# EAGLE board Dimmer (EAGLE 9.1.0)
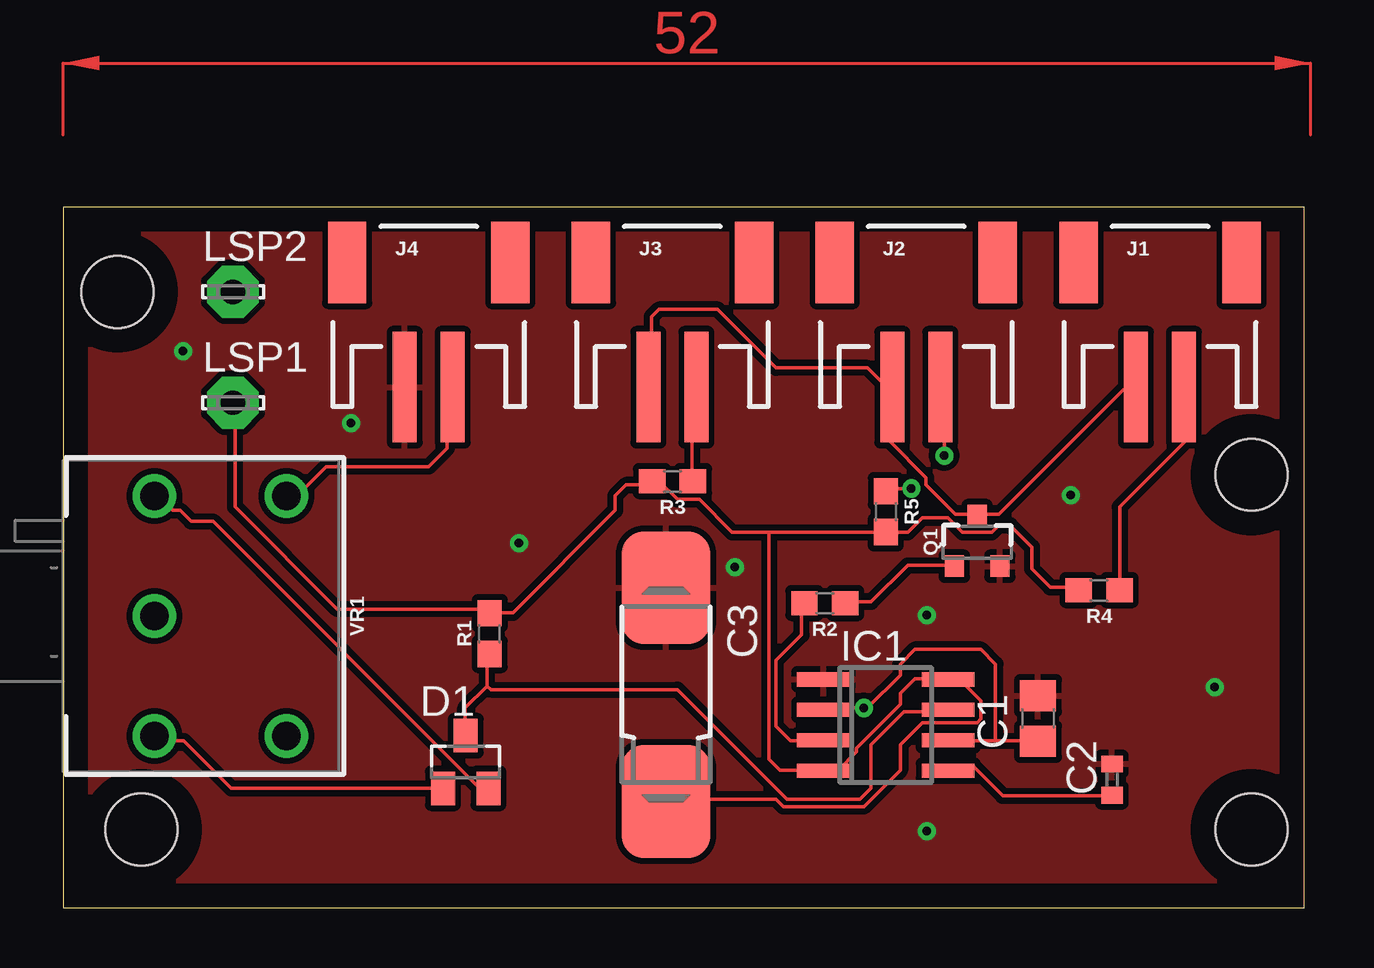
[diagram p0: board, top side]
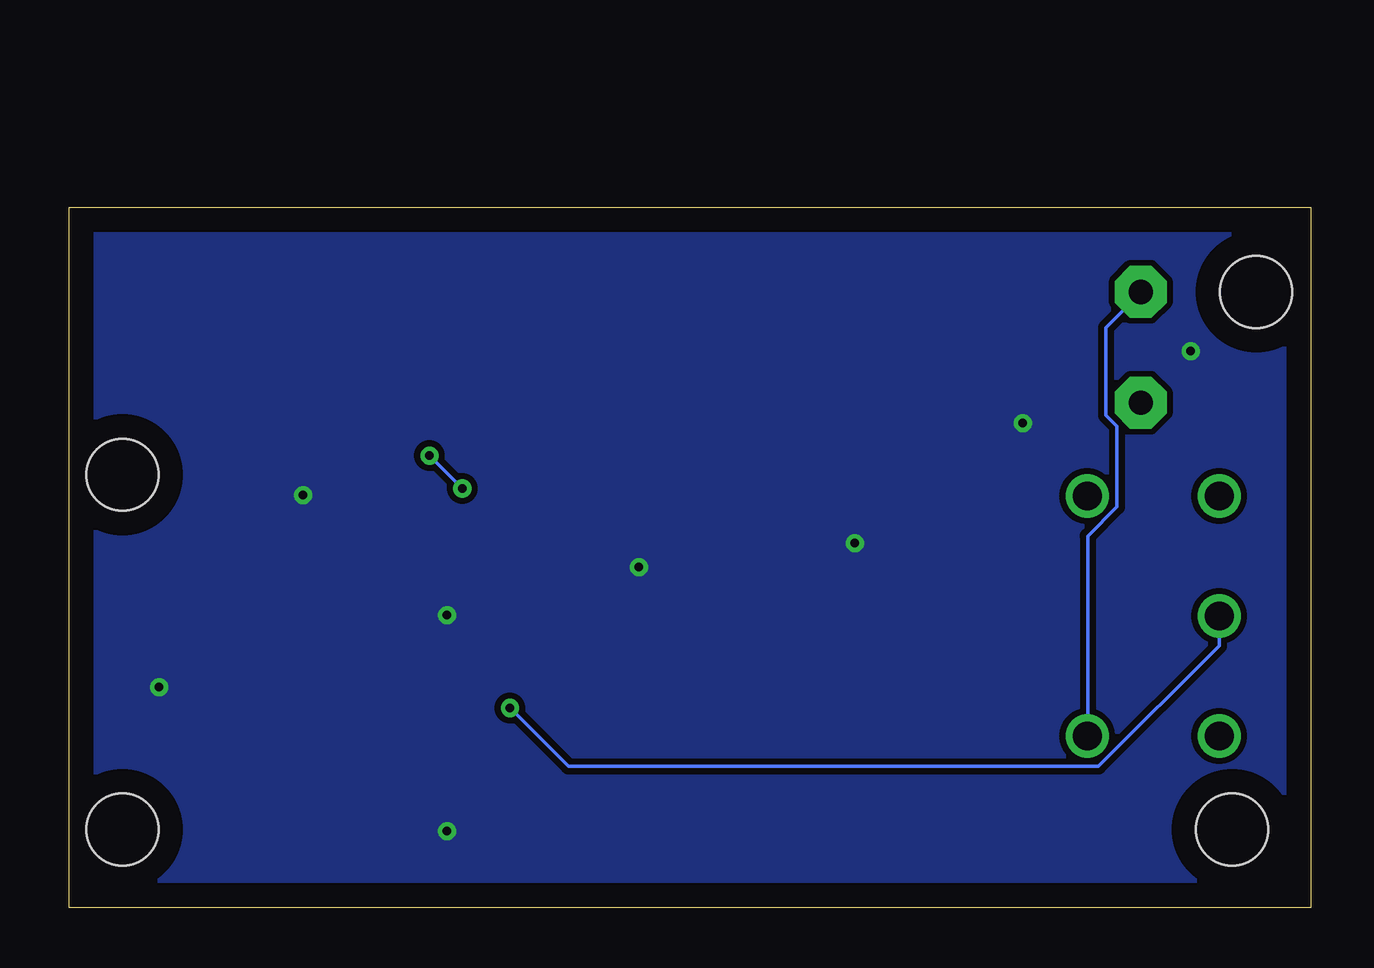
[diagram p1: board, bottom side, seen from below]

Size 51.74 x 29.2 mm. Coordinates in mm from the lower left corner, seen from the top.
Outline: 0,0 51.74,0 51.74,29.2 0,29.2 0,0
Copper layers (1*16): Top 0.035mm / dielectric 1.5mm / Bottom 0.035mm
Design rules "default": minimum track width 6mil, minimum drill 0.35mm, track to track 6mil, track to pad 6mil, pad to pad 6mil, via to via 6mil, smd to smd 6mil, copper to edge 40mil, drill to drill 6mil, minimum pad ring 10mil, minimum via ring 8mil, stop-mask expansion 4mil, vias tented up to drill 0mil, thermal gap 10mil
Holes 3 mm at 2.27,25.67 3.27,3.27 49.53,3.27 49.53,18.05

## Footprints (pad centres in the part's own frame; a part is rotated, then mirrored left to right if it is on the bottom)
C0805 = smd 1.3 x 1.5: 1 -0.95,0; 2 0.95,0
C0402 = smd 0.7 x 0.9: 1 -0.65,0; 2 0.65,0
085CS_1AW = smd 4.7 x 3.7: + 4.45,0; - -4.45,0
SOT23 = smd 1 x 1.4: 1 -0.95,-1.1; 2 0.95,-1.1; 3 0,1.1
SO08 = smd 0.6 x 2.2: 1 -1.905,-2.6; 2 -0.635,-2.6; 3 0.635,-2.6; 4 1.905,-2.6; 5 1.905,2.6; 6 0.635,2.6; 7 -0.635,2.6; 8 -1.905,2.6
JST-2-SMD = smd 1 x 4.6: 1 -1,-3.7; 2 1,-3.7 | smd 1.6 x 3.4: NC1 -3.4,1.5; NC2 3.4,1.5
LSP10 = drill 1.016 pad 2.159 octagon: MP 0,0
SOT23-3 = smd 0.8 x 0.9: 1 -0.95,-1; 2 0.95,-1; 3 0,1.1
0603 = smd 1.1 x 1: 1 -0.85,0; 2 0.85,0
POT-SWITCH-PTH = drill 1.2: 1 0,-5; 2 0,0; 3 0,5; S1 -5.5,5; S2 -5.5,-5

## Placement (x,y rotation side)
C1  0.1uF  [C0805]  40.64,7.89 90 top
C2  0.01uF  [C0402]  43.72,5.35 90 top
C3  470uF  [085CS_1AW]  25.13,8.89 270 top
D1  BAT54S  [SOT23]  16.78,6.08 0 top
IC1  LM555D  [SO08]  34.29,7.62 270 top
J1  [JST-2-SMD]  45.72,25.4 0 top
J2  [JST-2-SMD]  35.56,25.4 0 top
J3  [JST-2-SMD]  25.4,25.4 0 top
J4  [JST-2-SMD]  15.24,25.4 0 top
LSP1  LSP10  [LSP10]  7.08,21.05 0 top
LSP2  LSP10  [LSP10]  7.08,25.67 0 top
Q1  500mA/300V  [SOT23-3]  38.1,15.24 0 top
R1  1k  [0603]  17.78,11.43 90 top
R2  1k  [0603]  31.75,12.7 180 top
R3  1k  [0603]  25.4,17.78 180 top
R4  1k  [0603]  43.18,13.24 180 top
R5  1k  [0603]  34.29,16.51 270 top
VR1  1k  [POT-SWITCH-PTH]  3.81,12.16 180 top

## Library data of the parts
C1 C2 = eagle-ltspice; SPICEMODEL: NONE; SPICEPREFIX: C
C3 = resistor
D1 = diode
IC1 = linear
J1-J4 = SparkFun-Connectors; PROD_ID: CONN-11443; SF_ID: PRT-08612
LSP1 LSP2 = solpad
Q1 = SparkFun-DiscreteSemi; PROD_ID: TRANS-09116
R1-R5 = SparkFun-Resistors; PROD_ID: RES-07856
VR1 = SparkFun-Resistors; PROD_ID: RES-11300

## Nets
B$2: C3.+ IC1.4 IC1.8 LSP1.MP R1.2 R3.2 R4.2 R5.2
GND: C1.2 C2.2 C3.- IC1.1 J4.1 Q1.2
N$1: D1.1 VR1.3
N$2: D1.2 VR1.1
N$3: D1.3 IC1.7 R1.1
N$4: C2.1 IC1.5
N$5: C1.1 IC1.2 IC1.6 VR1.2
N$6: Q1.1 R2.1
N$7: IC1.3 R2.2
N$8: J1.1 J2.1 J3.1 Q1.3
N$9: J3.2 R3.1
N$10: LSP2.MP VR1.S1
N$11: J1.2 R4.1
N$12: J2.2 R5.1
N$13: J4.2 VR1.S2

## Tracks (layer width: path | path; a pad name or v marks a point on that pad's centre or on a via)
B$2
  Top 0.152: C3.+ 25.15,4.52 29.72,4.52 30.02,4.22 33.38,4.22 34.9,5.74 34.9,6.81 35.81,7.72 38.1,7.72 38.25,7.87 38.25,8.64 37.49,9.4 37.03,9.4 IC1.8 36.88,9.55 35.51,9.55 34.9,8.94 34.9,8.48 33.07,6.66 33.07,6.5 32.31,5.74 31.7,5.74 IC1.4 31.55,5.74 29.87,5.74 29.41,6.2 29.41,15.65 | 29.41,15.65 27.89,15.65 26.52,17.02 25.6,17.02 24.84,17.78 24.69,17.78 R3.2 24.54,17.78 24.38,17.63 23.47,17.63 23.01,17.17 23.01,16.56 18.75,12.29 17.83,12.29 R1.2 17.68,12.29 17.53,12.45 11.43,12.45 7.16,16.71 7.16,20.98 LSP1.MP | 29.41,15.65 34.29,15.65 | 34.29,15.65 R5.2 34.29,15.65 | 34.29,15.65 35.2,15.65 35.81,16.26 36.88,16.26 37.49,15.65 38.71,15.65 39.01,15.95 39.47,15.95 40.39,15.04 40.39,14.12 41.15,13.36 42.22,13.36 R4.2
GND  (via drill 0.35)
  other vias: 5,23.2 12,20.2 42,17.2 36,12.2 28,14.2 19,15.2 36,3.2 48,9.2
  pour Bottom (isolate 0.254): 0,29.21 52.07,29.21 52.07,0 0,0
  pour Top (isolate 0.254): 0,29.21 0,0 52.07,0 52.07,29.21
N$1
  Top 0.152: D1.1 15.7,4.98 7.01,4.98 5.03,6.96 3.96,6.96 3.81,7.11 VR1.3
N$2
  Top 0.152: D1.2 17.68,5.13 17.22,5.13 6.25,16.1 5.33,16.1 4.88,16.56 4.57,16.56 4.12,17.02 3.81,17.02 VR1.1
N$3
  Top 0.152: 17.68,9.25 17.68,10.47 R1.1 | 17.68,9.25 16.76,8.33 16.76,7.26 D1.3 | 17.68,9.25 17.83,9.09 25.6,9.09 30.18,4.52 33.22,4.52 33.68,4.98 33.68,6.81 35.05,8.18 36.88,8.18 IC1.7
N$4
  Top 0.152: C2.1 43.59,4.67 39.17,4.67 37.95,5.89 37.19,5.89 37.03,5.74 IC1.5
N$5  (via drill 0.35)
  Top 0.152: 38.86,6.96 37.03,6.96 IC1.6 | 38.86,6.96 40.54,6.96 C1.1 | 38.86,6.96 38.86,10.16 38.25,10.77 35.51,10.77 34.9,10.16 34.9,9.7 33.53,8.33 v33.38,8.33 31.7,8.33 IC1.2
  Bottom 0.152: v33.38,8.33 30.94,5.89 8.84,5.89 3.81,10.92 3.81,12.14 VR1.2
N$6
  Top 0.152: Q1.1 37.03,14.28 35.2,14.28 33.68,12.75 32.61,12.75 R2.1
N$7
  Top 0.152: R2.2 30.79,12.6 30.79,11.38 29.72,10.31 29.72,7.57 30.33,6.96 31.55,6.96 IC1.3
N$8
  Top 0.152: 38.1,16.41 37.19,16.41 35.97,17.63 35.97,17.93 34.44,19.46 34.44,21.59 | 38.1,16.41 Q1.3 38.1,16.41 | 34.44,21.59 J2.1 34.44,21.59 | 34.44,21.59 33.53,22.5 29.72,22.5 27.28,24.94 24.84,24.94 24.54,24.64 24.54,21.74 J3.1 | 38.1,16.41 39.01,16.41 44.2,21.59 44.65,21.59 J1.1
N$9
  Top 0.152: R3.1 26.21,17.78 26.21,21.44 26.36,21.59 J3.2
N$10
  Bottom 0.152: VR1.S1 9.3,7.26 9.3,15.49 8.08,16.71 8.08,20.07 8.53,20.52 8.53,24.18 7.16,25.55 LSP2.MP
N$11
  Top 0.152: R4.1 44.04,13.36 44.04,16.71 46.79,19.46 46.79,21.59 J1.2
N$12  (via drill 0.35)
  Top 0.152: v35.36,17.48 34.29,17.48 R5.1 | v36.73,18.85 36.73,21.44 36.58,21.59 J2.2
  Bottom 0.152: v36.73,18.85 v35.36,17.48
N$13
  Top 0.152: VR1.S2 9.45,17.17 9.75,17.17 10.97,18.39 15.24,18.39 16,19.15 16,21.44 16.15,21.59 J4.2
(copper drawn outside any net)
  shapes: Top area x2